# Altium PCB 限行提醒器.PcbDoc
Units mm, origin at the board's own origin, x right, y up, seen from the top; angles counter-clockwise.
Board outline 64 x 30 mm, 2 copper layers (Top Layer, Bottom Layer), stack 1.471 mm thick; 14 components, 29 nets, 90 pads, 4 vias.
Unrouted connection lines stored in the file: 16.
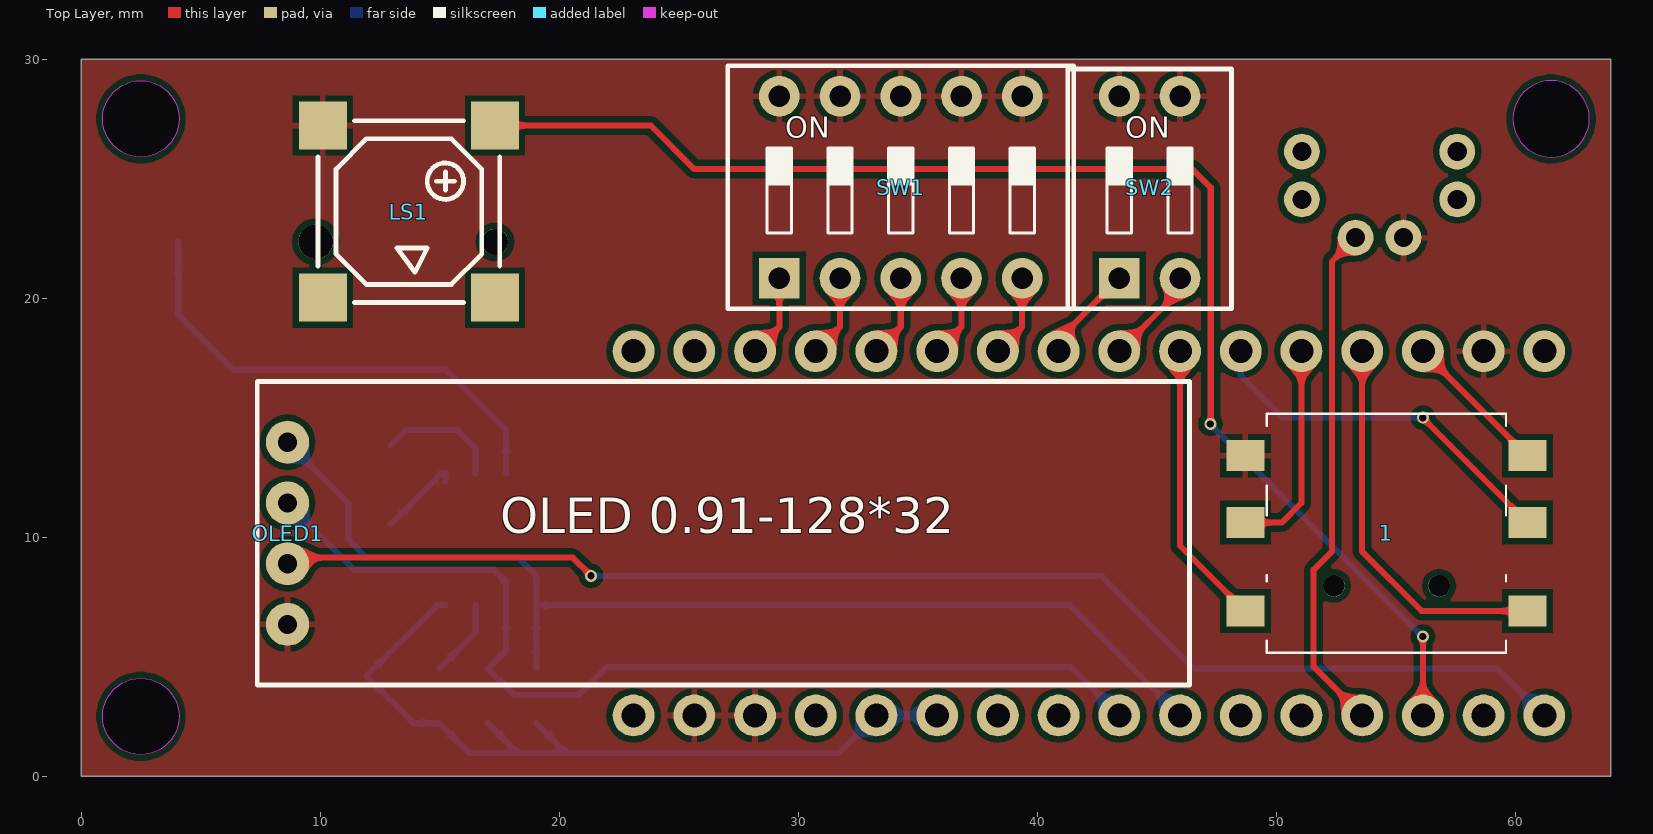
[diagram p0: Top Layer view]
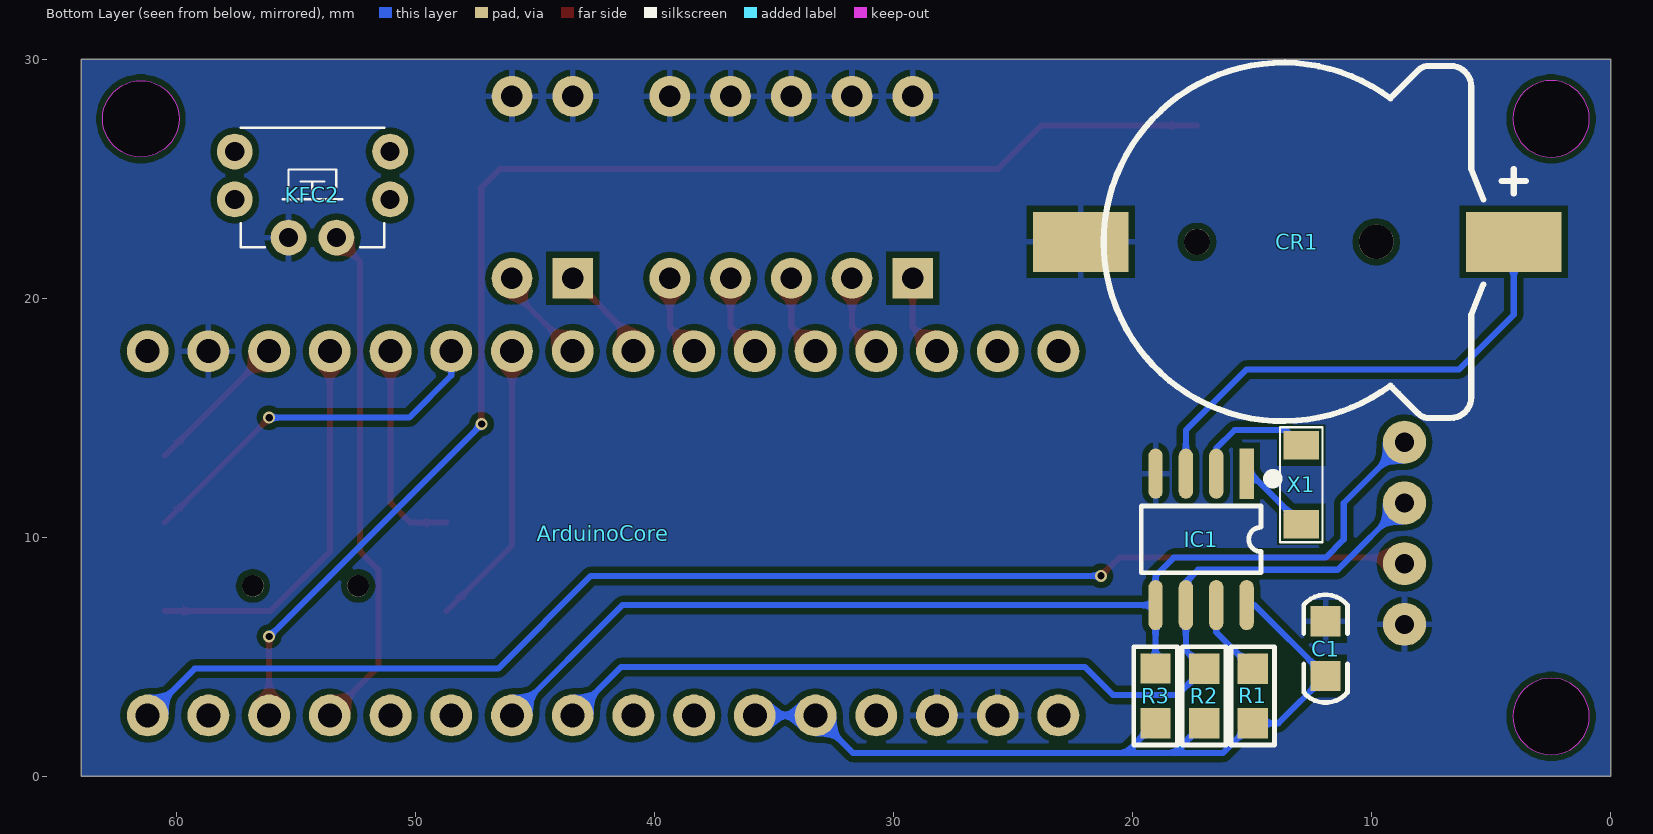
[diagram p1: Bottom Layer view, seen from below]
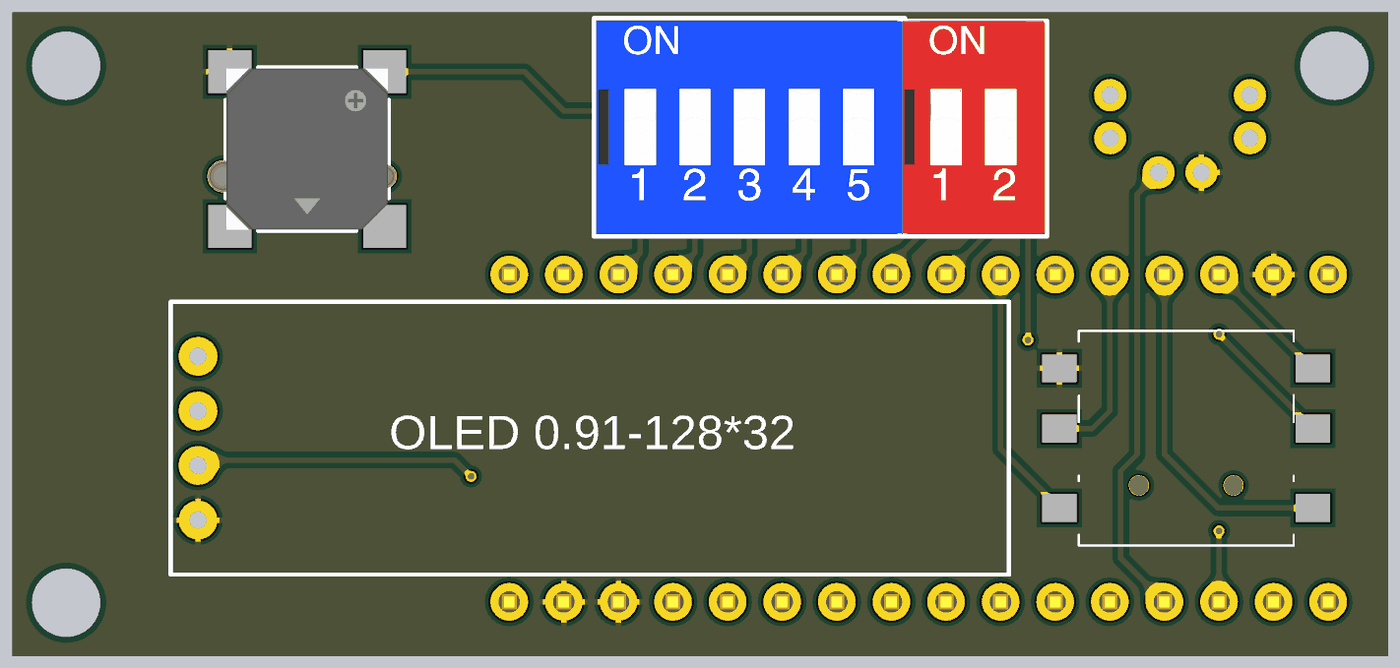
[diagram p2: 3D render of the assembled board from above, using the file's embedded part models]
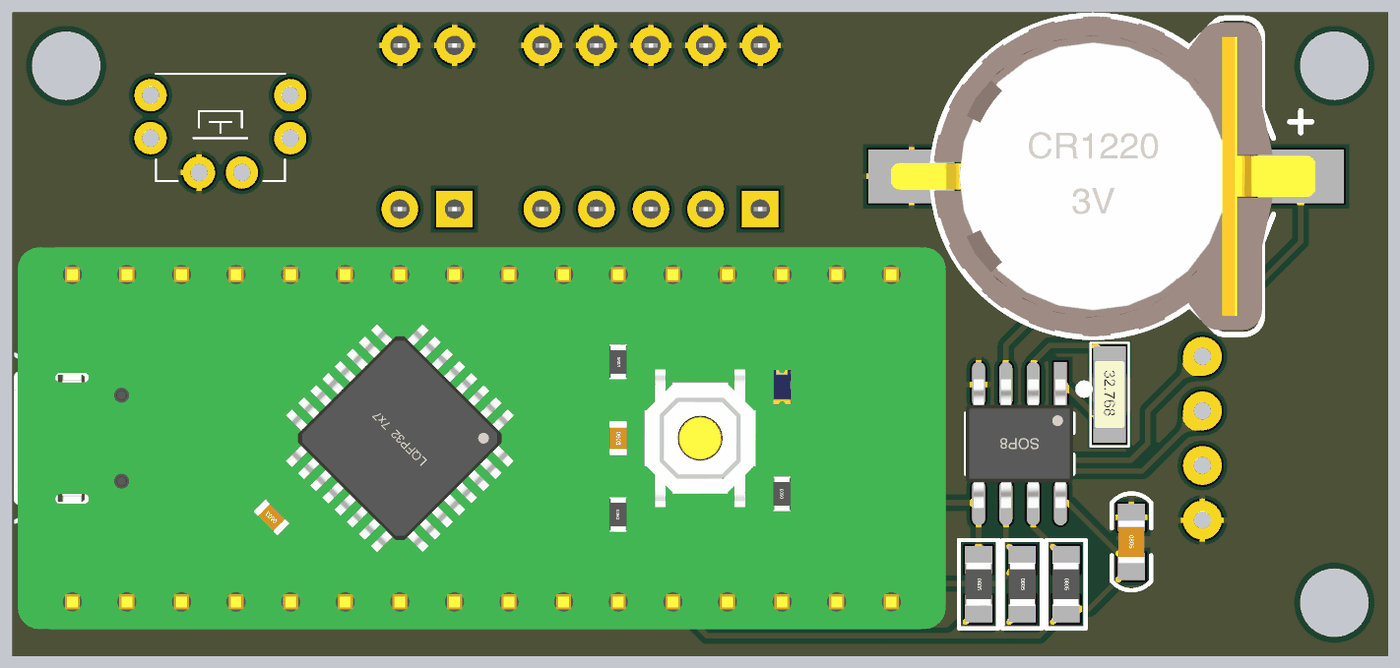
[diagram p3: 3D render of the assembled board from below, using the file's embedded part models]

## Layer stack, top to bottom
Top Solder: solder mask 0.0102, Solder Resist, Dk 3.5
Top Layer: signal copper 0.0356
Dielectric 1: dielectric 1.4, FR-4, Dk 4.8
Bottom Layer: signal copper 0.0356
Bottom Solder: solder mask 0.0102, Solder Resist, Dk 3.5

## Board outline
0,0 0,30 64,30 64,0
cut-out: 2.5,0.9 cw(c2.5,2.5) 0.9,2.5 cw(c2.5,2.5) 2.5,4.1 cw(c2.5,2.5) 4.1,2.5 cw(c2.5,2.5)
cut-out: 2.5,25.9 cw(c2.5,27.5) 0.9,27.5 cw(c2.5,27.5) 2.5,29.1 cw(c2.5,27.5) 4.1,27.5 cw(c2.5,27.5)
cut-out: 59.9,27.5 ccw(c61.5,27.5) 61.5,25.9 ccw(c61.5,27.5) 63.1,27.5 ccw(c61.5,27.5) 61.5,29.1 ccw(c61.5,27.5)

## Design rules (kind name [scope] priority, off if disabled: settings)
Clearance [All] p1: gap=0.254 ignorepadtopadclearanceinfootprint=FALSE except(0: Arc-Hole Track-Hole SMDPad-Hole THPad-Hole Via-Hole Fill-Hole Poly-Hole Region-Hole Text-Hole)
PolygonConnect [All] p1: connectstyle=Relief reliefconductorwidth=0.254 reliefentries=4 polygonreliefangle="90 Angle" airgapwidth=0.254
RoutingVias [All] p1: holewidth=0.305 width=0.508 viastyle="Through Hole" minholewidth=0.305 minwidth=0.508 maxholewidth=0.305 maxwidth=0.508
SolderMaskExpansion [All] p1: expansion=0.102
Width [All] p1: maxlimit=0.254 minlimit=0.254 preferedwidth=0.254
30 further rules are at their usual default settings.

## Components (designator, comment, footprint, x,y, rotation, side; value= is the part's Value field where it differs from the comment)
1 "HM106" "WX SMD-10*10*10" 54.61,10.16 r0 top
ArduinoCore "ArduinoCore" ARDUINOCORE 42.164,10.16 r270 bottom
C1 "104" "C 0805" 11.938,5.334 r270 bottom
CR1 "1220" CR1220_B 13.716,22.352 r180 bottom
IC1 "DS1307" SOP8_M 17.145,9.906 r270 bottom
KFC2 "KFC H 6*6" "KFC DIP-6*6*8_V" 54.322,24.13 r0 bottom
LS1 "DC5V" BUZZER-7525 15.24,24.892 r270 top
OLED1 "OLED 1.3-12864_7pin" "OLED 0.91-12832_4PIN" 7.366,16.51 r0 top
R1 "4.7K" "R 0805" 14.986,3.359 r270 bottom
R2 "4.7K" "R 0805" 17.018,3.359 r270 bottom
R3 "4.7K" "R 0805" 19.05,3.36 r270 bottom
SW1 "CSW-5P" "CSW DIP-5P" 34.29,24.638 r0 top
SW2 "CSW-2P" "CSW DIP-2P_G" 44.704,24.638 r0 top
X1 "32.768KHz" XTAL-3215 12.954,12.192 r270 bottom

## Footprints (in the part's own frame and the unit in brackets; to place one, negate y for a bottom-side part, rotate by r counter-clockwise, add the part's x,y. Pads: shape width x height; smd on the part's side, far side on the other; paste and mask are expansions set on the pad)
ARDUINOCORE [mm]
  round 1.75 hole 1: 1(-7.62,19.05) 2(-7.62,16.51) 3(-7.62,13.97) 4(-7.62,11.43) 5(-7.62,8.89) 6(-7.62,6.35) 7(-7.62,3.81) 8(-7.62,1.27) 9(-7.62,-1.27) 10(-7.62,-3.81) 11(-7.62,-6.35) 12(-7.62,-8.89) 13(-7.62,-11.43) 14(-7.62,-13.97) 15(-7.62,-16.51) 16(-7.62,-19.05) 17(7.62,-19.05) 18(7.62,-16.51) 19(7.62,-13.97) 20(7.62,-11.43) 21(7.62,-8.89) 22(7.62,-6.35) 23(7.62,-3.81) 24(7.62,-1.27) 25(7.62,1.27) 26(7.62,3.81) 27(7.62,6.35) 28(7.62,8.89) 29(7.62,11.43) 30(7.62,13.97) 31(7.62,16.51) 32(7.62,19.05)
  body extent -8.89,-21.77 8.89,21.59, height 6.4
BUZZER-7525 [mm] "长：7.5mm，宽：7.5mm，高：2.5mm"
  rect 2x2 smd: 1(-2.33,2.076) 2(-2.33,-5.124) 3(4.87,-5.124) 4(4.87,2.076)
  silkscreen extent -2.53,-5.32 5.07,2.28, body extent -2.48,-5.27 5.02,2.23, height 2.55
"C 0805" [mil] "无极性贴片电容"
  rect 50x50 smd: 1(-45,0) 2(45,0)
  silkscreen extent -89,-36 89,36, body extent -39,-24 39,24, height 20
CR1220_B [mm] "纽扣电池座"
  round 1.1 hole 1.1: 0(-3.6,0)
  round 1.45 hole 1.45: 0(3.9,0)
  rect 4x2.5 smd: 1(9.652,0) 2(-8.458,0)
  silkscreen extent -7.5,-7.5 10.16,7.5, body extent -9.42,-7.45 10.34,7.45, height 4.05
"CSW DIP-2P_G" [mm] "6.6*9.9*7mm"
  rect 1.7x1.7 hole 0.9: 1(-1.27,-3.81)
  round 1.7 hole 0.9: 2(1.27,-3.81) 3(1.27,3.81) 4(-1.27,3.81)
  silkscreen extent -3.43,-5.08 3.43,4.95, body extent -3.32,-4.95 3.32,4.95, height 6.65
"CSW DIP-5P" [mm] "14.2*9.9*7mm"
  rect 1.7x1.7 hole 0.9: 1(-5.08,-3.81)
  round 1.7 hole 0.9: 2(-2.54,-3.81) 3(0,-3.81) 4(2.54,-3.81) 5(5.08,-3.81) 6(5.08,3.81) 7(2.54,3.81) 8(0,3.81) 9(-2.54,3.81) 10(-5.08,3.81)
  silkscreen extent -7.24,-5.08 7.24,5.08, body extent -7.13,-4.95 7.13,4.95, height 6.65
"KFC DIP-6*6*8_V" [mm] "侧按自锁开关 6*6*8mm"
  round 1.5 hole 0.8: 1(-3.25,-2) 2(-3.25,0) 3(-1,1.6) 4(1,1.6) 5(3.25,0) 6(3.25,-2)
  silkscreen extent -3,-3 3,2, body extent -3,-10.9 3,1.9, height 5.95
"OLED 0.91-12832_4PIN" [mm]
  round 1.8 hole 0.8: 1(1.27,-2.54) 2(1.27,-5.08) 3(1.27,-7.62) 4(1.27,-10.16)
  silkscreen extent 0,-12.7 39,0, body extent 0,-12.35 38.1,-0.35, height 5.58
"R 0805" [mil] "1/8W贴片电阻"
  rect 50x50 smd: 1(-45,0) 2(45,0)
  silkscreen extent -81,-36 81,36, body extent -39,-25 39,25, height 20
SOP8_M [mm] "5*6*1.8mm（长宽高）"
  rect 2.1x0.6 smd: 1(-2.75,1.905)
  oval 2.1x0.6 smd: 2(-2.75,0.635) 3(-2.75,-0.635) 4(-2.75,-1.905) 5(2.75,-1.905) 6(2.75,-0.635) 7(2.75,0.635) 8(2.75,1.905)
  silkscreen extent -2.69,-2.5 1.4,3.15, body extent -3,-2.5 3,2.5, height 1.9
"WX SMD-10*10*10" [mm]
  rect 1.6x1.3 smd: 1(-5.9,3.25) 2(-5.9,0.45) 3(-5.9,-3.25) 4(5.9,-3.25) 5(5.9,0.45) 6(5.9,3.25)
  round 0.9 hole 0.9: ""(-2.2,-2.2) ""(2.2,-2.2)
  silkscreen extent -5,-5 5,5, body extent -5,-5 5,5, height 12
XTAL-3215 [mm]
  rect 1.2x1.5 smd: 1(-1.65,0) 2(1.65,0)
  silkscreen extent -2.41,-0.89 2.41,0.89, body extent -1.6,-0.75 1.6,0.75, height 0.81

## Part data
C1: library part C, "无极性贴片电容"
CR1: library part CR-3V, "微型电池"
IC1: "1307实时时钟芯片", BOM名称=ÊµÊ±Ê, 学习资源=www.ooocke.
KFC2: "6x6横置自锁开关"
LS1: library part BEEP, "蜂鸣器"
OLED1: library part "OLED 0.91_IIC_4pin", "12832 点阵屏", BOM名称="12864 点", 学习资源=www.ooocke.
R1 R2 R3: library part R, "贴片电阻"
SW1: "5路编码开关"
SW2: "2路编码开关"
X1: library part XTAL-2, "2脚晶振", BOM名称=2脚, 学习资源=www.ooocke.

## Via types
v1: diameter 0.508, hole 0.305, Top Layer to Bottom Layer, 4 vias

## Nets (pads, with @x,y where several pads share a name; then routed paths per layer and width w, separated by ;. In a path a pad name is that pad's centre, name@x,y a point inside that pad or via, vN(x,y) a via of type N, cw(c..) or ccw(c..) an arc to the next point about the centre after c; other vN are vias at no path point)
3V3: ArduinoCore.17 OLED1.3 | length 55.4
  Top Layer w0.254: OLED1.3 8.89,9.144 20.574,9.144 v1(21.336,8.382)
  Bottom Layer w0.254: v1(21.336,8.382) 42.672,8.382 46.551,4.503 59.251,4.503 ArduinoCore.17
A0: ArduinoCore.19 LS1.1 | length 56.8
  Top Layer w0.254: LS1.1 23.832,27.222 25.654,25.4 46.482,25.4 47.258,24.624 47.258,14.746 v1(47.244,14.732) ; ArduinoCore.19 v1(56.134,5.842)
  Bottom Layer w0.254: v1(47.244,14.732) v1(56.134,5.842)
A1: ArduinoCore.20 KFC2.3 | length 21.6
  Top Layer w0.254: KFC2.3 52.324,21.532 52.324,9.398 51.562,8.636 51.562,4.572 ArduinoCore.20
A2: ArduinoCore.21
A3: ArduinoCore.22
A4: ArduinoCore.23 IC1.5 OLED1.1 R3.1 | length 46.3
  Bottom Layer w0.254: OLED1.1 11.176,11.43 11.176,9.906 11.938,9.144 18.288,9.144 19.05,8.382 IC1.5 ; R3.1 IC1.5 ; ArduinoCore.23 41.358,7.156 IC1.5
A5: ArduinoCore.24 IC1.6 OLED1.2 R2.1 | length 42.7
  Bottom Layer w0.254: OLED1.2 11.43,8.636 17.272,8.636 17.78,8.128 IC1.6 17.78,5.264 R2.1 18.131,3.389 20.828,3.389 22.011,4.572 41.402,4.572 ArduinoCore.24
A6: ArduinoCore.25
A7: ArduinoCore.26
D0: ArduinoCore.1
D1: ArduinoCore.2
D2: ArduinoCore.3 SW1.1 | length 3.5
  Top Layer w0.254: ArduinoCore.3 29.21,18.796 SW1.1
D3: ArduinoCore.4 SW1.2 | length 3.5
  Top Layer w0.254: ArduinoCore.4 31.75,18.796 SW1.2
D4: ArduinoCore.5 SW1.3 | length 3.5
  Top Layer w0.254: ArduinoCore.5 34.29,18.796 SW1.3
D5: ArduinoCore.6 SW1.4 | length 3.5
  Top Layer w0.254: ArduinoCore.6 36.83,18.796 SW1.4
D6: ArduinoCore.7 SW1.5 | length 3.5
  Top Layer w0.254: ArduinoCore.7 39.37,18.796 SW1.5
D7: ArduinoCore.8 SW2.1 | length 4.1
  Top Layer w0.254: ArduinoCore.8 40.894,18.288 SW2.1
D8: ArduinoCore.9 SW2.2 | length 4.1
  Top Layer w0.254: ArduinoCore.9 45.974,20.32 SW2.2
D9: 1.3 ArduinoCore.10 | length 12
  Top Layer w0.254: ArduinoCore.10 45.974,9.646 1.3
D10: 1.5 ArduinoCore.11 | length 15.6
  Top Layer w0.254: v1(56.134,15) 56.134,14.986 1.5
  Bottom Layer w0.254: ArduinoCore.11 48.514,16.764 50.278,15 v1(56.134,15)
D11: 1.2 ArduinoCore.12 | length 9
  Top Layer w0.254: 1.2 50.234,10.61 51.054,11.43 ArduinoCore.12
D12: 1.4 ArduinoCore.13 | length 16.3
  Top Layer w0.254: ArduinoCore.13 53.594,9.398 56.082,6.91 1.4
D13: 1.6 ArduinoCore.14 | length 6.2
  Top Layer w0.254: ArduinoCore.14 60.504,13.41 1.6
GND: 1.1 ArduinoCore.15 ArduinoCore.30 ArduinoCore.31 C1.1 CR1.2 IC1.4 KFC2.4 LS1.2 OLED1.4 SW1.6 SW1.7 SW1.8 SW1.9 SW1.10 SW2.3 SW2.4
NetCR1_1: CR1.1 IC1.3 | length 20.6
  Bottom Layer w0.254: CR1.1 4.064,19.304 6.35,17.018 15.24,17.018 17.78,14.478 IC1.3
NetIC1_1: IC1.1 X1.2 | length 3.5
  Bottom Layer w0.254: X1.2 15.068,12.656 IC1.1 IC1.1@15.24,12.32
NetIC1_2: IC1.2 X1.1 | length 5.2
  Bottom Layer w0.254: X1.1 13.59,14.478 15.748,14.478 16.51,13.716 IC1.2
NetIC1_7: IC1.7 R1.1 | length 3.3
  Bottom Layer w0.254: R1.1 16.51,6.026 IC1.7
VCC: ArduinoCore.27 ArduinoCore.28 C1.2 IC1.8 R1.2 R2.2 R3.2 | length 34.5
  Bottom Layer w0.254: IC1.8 14.903,7.156 C1.2 13.913,2.216 R1.2 16.24,0.961 18.272,0.961 ; R2.2 18.272,0.961 ; 18.796,0.961 18.272,0.961 ; R3.2 20.305,0.961 ; ArduinoCore.27 ArduinoCore.28 31.695,0.961 20.305,0.961 ; 18.272,0.961 20.305,0.961
pads on no net: 1. ArduinoCore.16 ArduinoCore.18 ArduinoCore.29 ArduinoCore.32 CR1.0 KFC2.1 KFC2.2 KFC2.5 KFC2.6 LS1.3 LS1.4

## Polygon pours and split planes (outlines as drawn)
GND on Top Layer "GND_L01_P000" (solid, remove dead copper, pour order 0): 0,0 0,30 64,30 64,0
GND on Bottom Layer "GND_L02_P001" (solid, remove dead copper, pour order 1): 0,0 0,30 64,30 64,0

## Silkscreen, mask and mechanical layers (free items; w line width, h text height)
Mechanical 1:
  circle w0.254: c2.5,2.5 r1.6
  circle w0.254: c2.5,27.5 r1.6
  circle w0.254: c61.5,27.5 r1.6
  lines w0.1: 0,0 64,0 64,30 0,30 0,0

## Text inside footprints (layer, text, board x,y; h text height)
OLED1: Top Overlay "OLED 0.91-128*32" at 17.526,9.66 h2.54
SW1: Top Overlay "ON" at 29.464,26.416 h1.52
SW2: Top Overlay "ON" at 43.688,26.416 h1.52